# Altium PCB Holder_Base_V1.PcbDoc
Units mm, origin at the board's own origin, x right, y up, seen from the top; angles counter-clockwise.
Board outline 69.94 x 50 mm, 2 copper layers (Top Layer, Bottom Layer); 9 components, 19 nets, 21 pads, 0 vias.
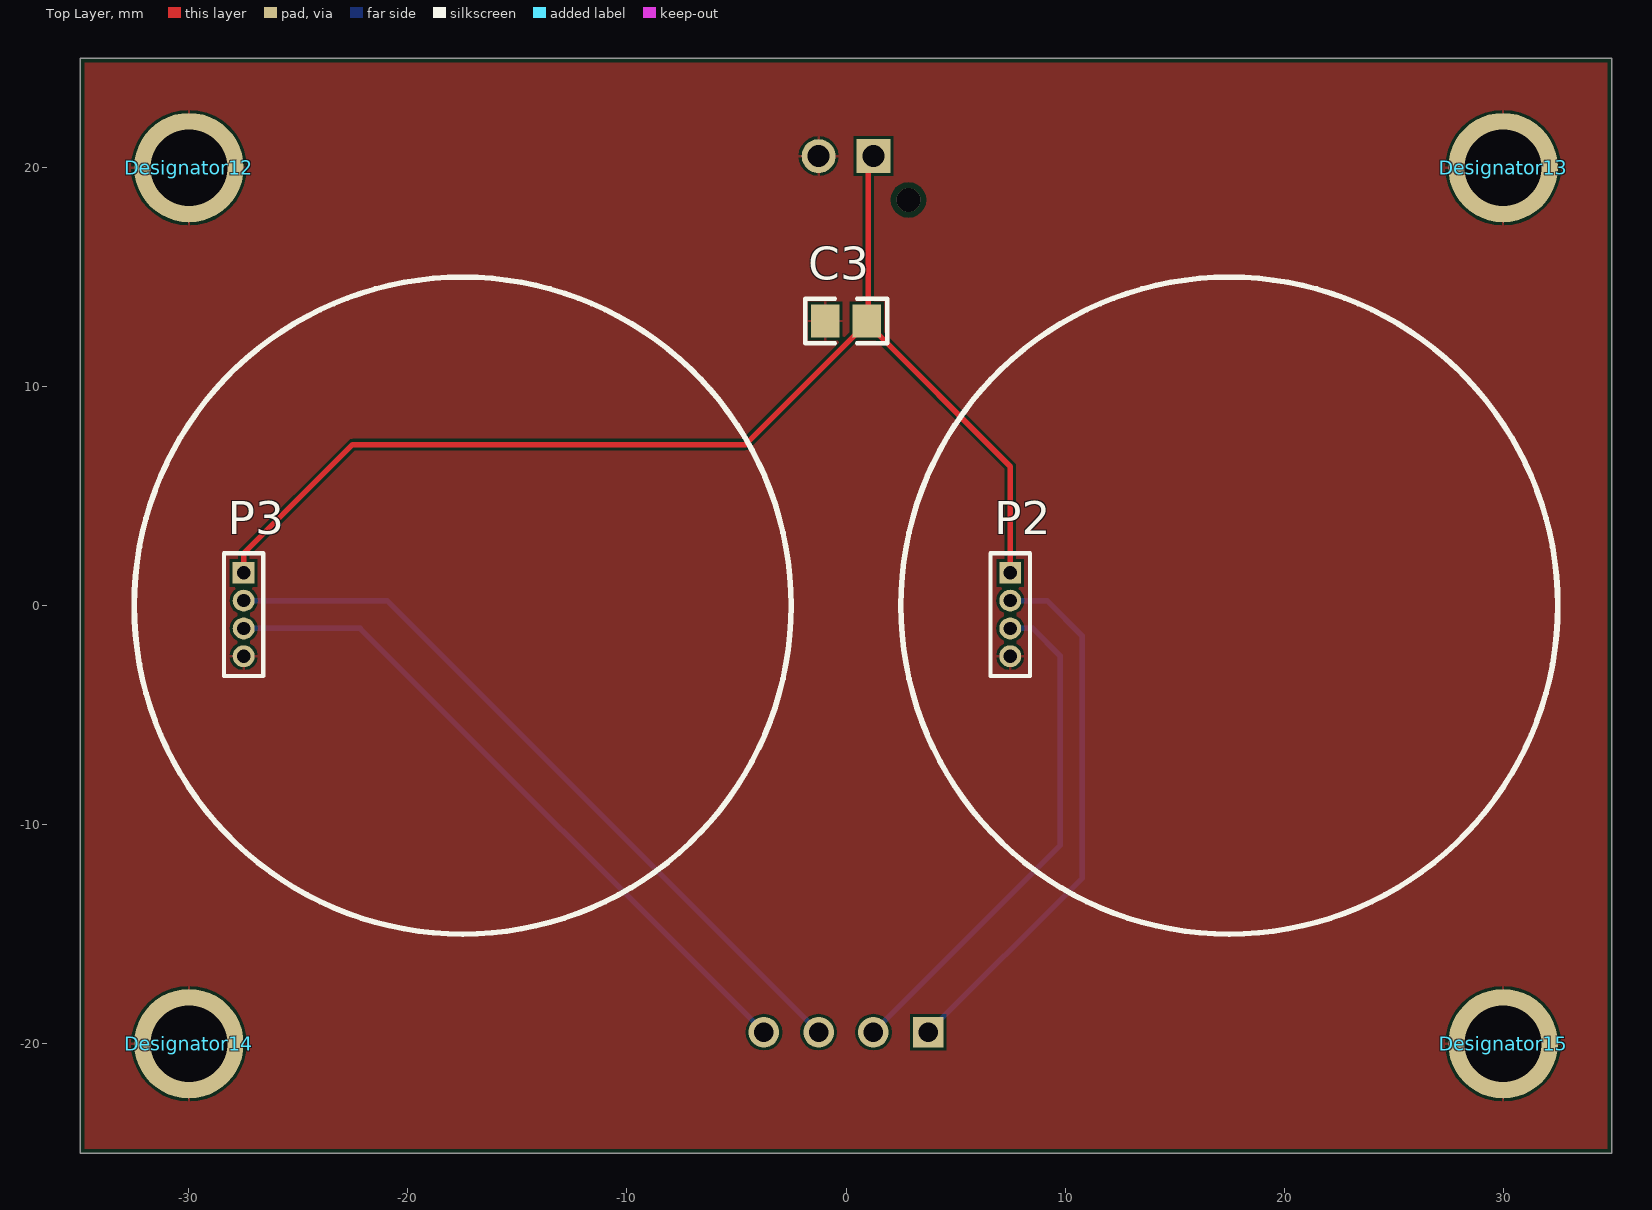
[diagram p0: Top Layer view]
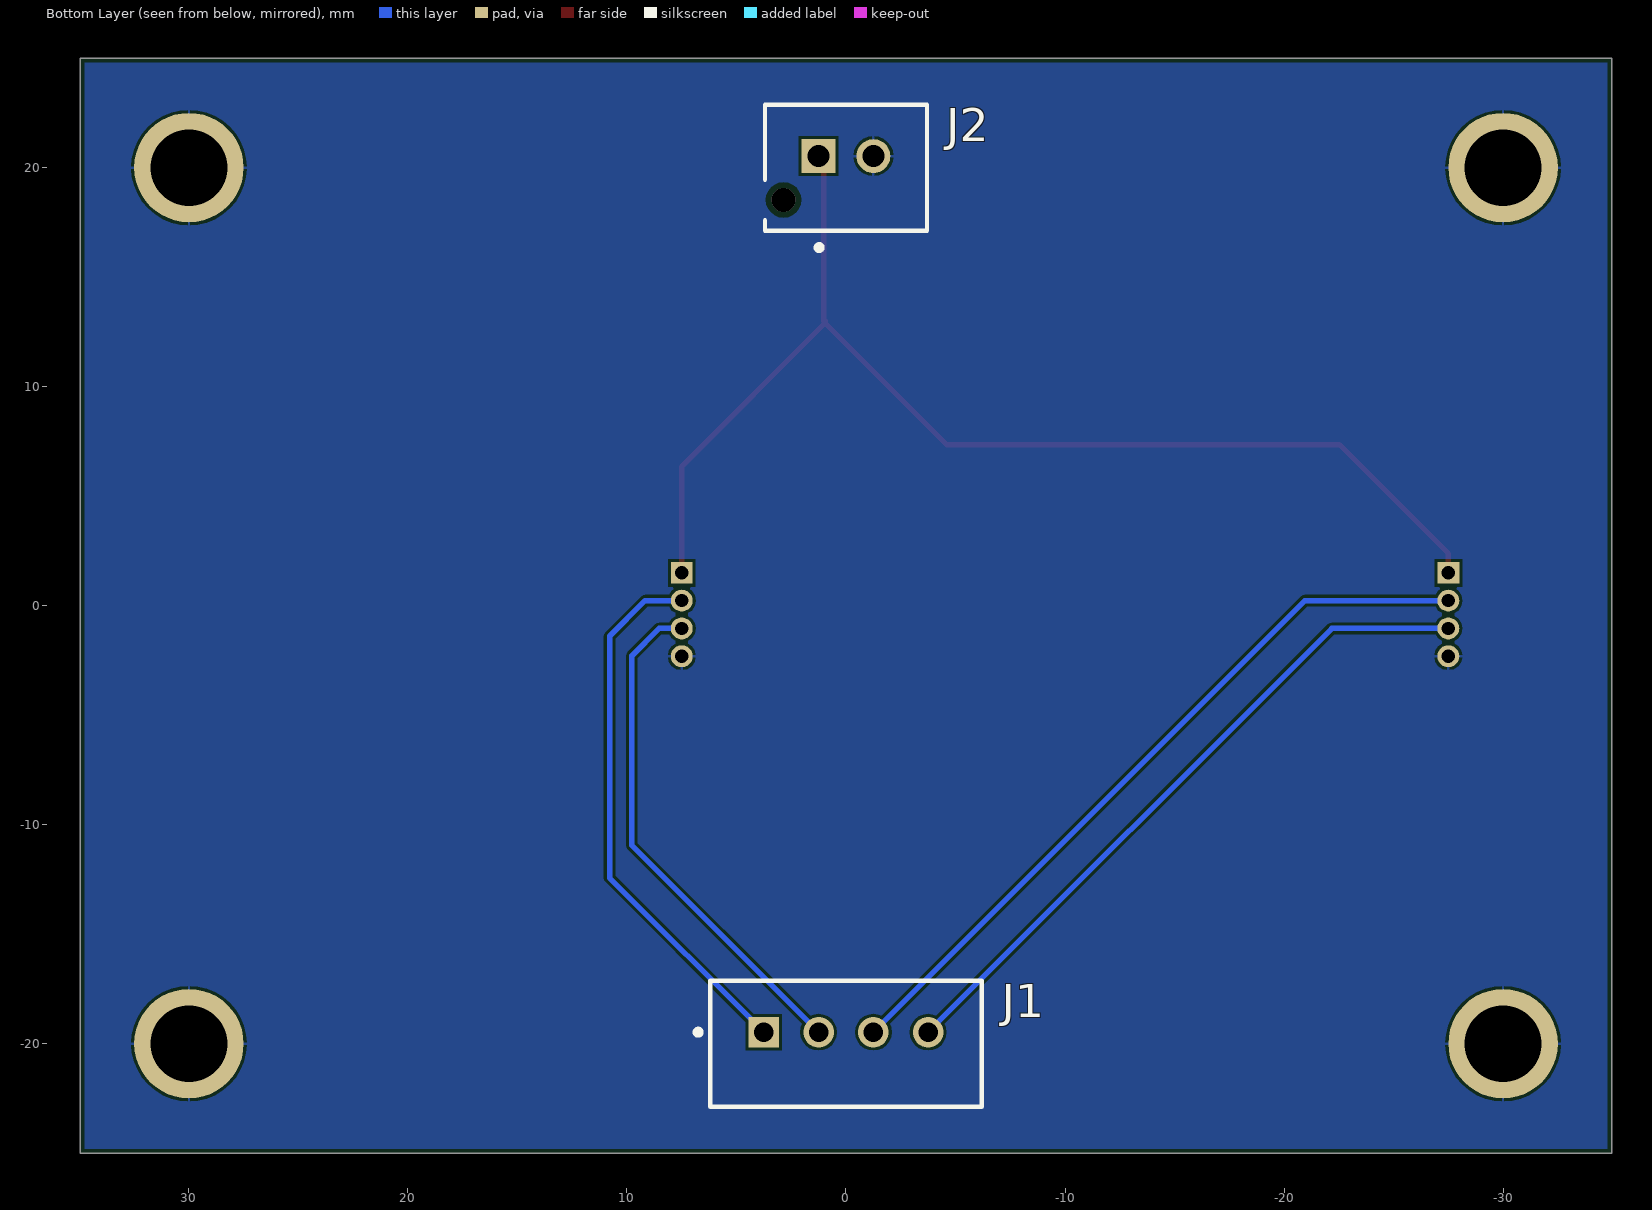
[diagram p1: Bottom Layer view, seen from below]

## Layer stack, top to bottom
Top Solder: solder mask 0.0102, Solder Resist, Dk 3.5
Top Layer: signal copper 0.0356
Dielectric 1: dielectric 0.32, FR-4, Dk 4.8
Bottom Layer: signal copper 0.0356
Bottom Solder: solder mask 0.0102, Solder Resist, Dk 3.5

## Board outline
-34.97,-25 -34.97,25 34.969,25 34.969,-25

## Design rules (kind name [scope] priority, off if disabled: settings)
BoardOutlineClearance [All] p1: gap=0.2 ignorepadtopadclearanceinfootprint=FALSE
Clearance [All] p1: gap=0.127 ignorepadtopadclearanceinfootprint=TRUE except(0.254: Arc-Hole Track-Hole SMDPad-Hole THPad-Hole Via-Hole Fill-Hole Poly-Hole Region-Hole Text-Hole)
ComponentClearance [All] p1: gap=0.127 collisioncheckmode=3 verticalgap=0.127 showdistances=TRUE
DiffPairsRouting [All] p1: maxlimit=0.254 minlimit=0.127 mostfreqgap=0.127 toplayer_minwidth=0.127 toplayer_maxwidth=25.4 toplayer_prefwidth=0.127 bottomlayer_minwidth=0.127 bottomlayer_maxwidth=25.4 bottomlayer_prefwidth=0.127 maxuncoupledlength=12.7
Height [All] p1: minheight=0 maxheight=1816.048 prefheight=12.7
HoleSize [All] p1: absolutevalues=TRUE maxlimit=6.3 minlimit=0.3 maxpercent=80.000 minpercent=20.000
HoleToHoleClearance [All] p1: gap=0.254 allowstackedmicrovias=FALSE
MinimumAnnularRing [All] p1: minimumring=0.152
MinimumSolderMaskSliver [All] p1: minsoldermaskwidth=0.152
PlaneClearance [All] p1: clearance=0.127
PlaneConnect PlaneConnectPowerPads [InPadClass('PowerPads')] p1: planeconnectstyle=Direct reliefexpansion=0.508 reliefentries=4 reliefconductorwidth=0.254 reliefairgap=0.254
PlaneConnect [All] p2: pad.planeconnectstyle=Relief pad.reliefexpansion=0.3 pad.reliefentries=4 pad.reliefconductorwidth=0.127 pad.reliefairgap=0.127 via.planeconnectstyle=Direct via.reliefexpansion=0.3 via.reliefentries=4 via.reliefconductorwidth=0.127 via.reliefairgap=0.127
PolygonConnect PolygonConnectPowerPads [All vs (InPadClass('PowerPads'))] p1: connectstyle=Direct reliefconductorwidth=0.254 reliefentries=4 polygonreliefangle="90 Angle" airgapwidth=0.254
PolygonConnect [All] p2: thpad.connectstyle=Relief thpad.reliefconductorwidth=0.127 thpad.reliefentries=4 thpad.polygonreliefangle="90 Angle" thpad.airgapwidth=0.127 smdpad.connectstyle=Relief smdpad.reliefconductorwidth=0.127 smdpad.reliefentries=4 smdpad.polygonreliefangle="90 Angle" smdpad.airgapwidth=0.127 via.connectstyle=Direct via.reliefconductorwidth=0.127 via.reliefentries=4 via.polygonreliefangle="90 Angle" via.airgapwidth=0.127
RoomDefinition Sheet2 [InComponentClass('Sheet2')] p1: confinementstyle=ConfineIn formatcopy=TRUE lockcomponents=FALSE outline -34.417,-24.257 34.29,-24.257 34.29,24.003 -34.417,24.003
RoutingVias [All] p1: holewidth=0.3 width=0.6 viastyle="Through Hole" minholewidth=0.3 minwidth=0.6 maxholewidth=0.6 maxwidth=6.6
SilkToSilkClearance [All] p1: silktosilkclearance=0.127
SilkToSolderMaskClearance [IsPad] p1: minsilkscreentomaskgap=0.127 clearancetoexposedcopper=TRUE
SolderMaskExpansion [All] p1: expansion=0.051 istentingtop=FALSE
UnRoutedNet [All] p1: checkbadconnections=TRUE
Width Width_10mil [All] p1: maxlimit=25.4 minlimit=0.254 preferedwidth=0.254 minimp=50.000000 maximp=50.000000 favimp=50.000000
Width Width_6mil [All] p2: maxlimit=25.4 minlimit=0.152 preferedwidth=0.152 minimp=50.000000 maximp=50.000000 favimp=50.000000
Width Power_20mil [All] p3: maxlimit=25.4 minlimit=0.508 preferedwidth=0.508 minimp=50.000000 maximp=50.000000 favimp=50.000000
Width Power_12mil [All] p4: maxlimit=25.4 minlimit=0.305 preferedwidth=0.305 minimp=50.000000 maximp=50.000000 favimp=50.000000
Width Width_5mil [All] p5: maxlimit=25.4 minlimit=0.127 preferedwidth=0.127 minimp=50.000000 maximp=50.000000 favimp=50.000000
Width [All] p6: maxlimit=0.254 minlimit=0.254 preferedwidth=0.254
19 further rules are at their usual default settings.

## Classes and differential pairs
component class Sheet2: C3 P2 P3

## Components (designator, comment, footprint, x,y, rotation, side; value= is the part's Value field where it differs from the comment)
C3 "10uF" 0805C 0,13 r0 top
Designator12 "Comment" SCREW_HOLE#1 -30.099,20.574 r0 top
Designator13 "Comment" SCREW_HOLE#2 29.972,19.939 r0 top
Designator14 "Comment" SCREW_HOLE#3 -29.464,-21.463 r0 top
Designator15 "Comment" SCREW_HOLE#4 30.988,-20.955 r0 top
J1 "B4B-XH-A(LF)(SN)" FP-B4B-XH-A_LF_SN-MFG 0,-20 r0 bottom
J2 "B2B-XH-AM(LF)(SN)" FP-B2B-XH-AM_LF_SN-MFG 0,20 r0 bottom
P2 "MHDR1X4" MHDR1X4 7.5,1.5 r270 top
P3 "MHDR1X4" MHDR1X4 -27.5,1.5 r270 top

## Footprints (in the part's own frame and the unit in brackets; to place one, negate y for a bottom-side part, rotate by r counter-clockwise, add the part's x,y. Pads: shape width x height; smd on the part's side, far side on the other; paste and mask are expansions set on the pad)
0805C [mm] "0805 Footprint"
  rect 1.3x1.5 smd: 1(-0.95,0) 2(0.95,0)
  silkscreen extent -1.87,-1.02 1.88,1.02, body extent -1,-0.62 1,0.63, height 0.78
FP-B2B-XH-AM_LF_SN-MFG [mm]
  rect 1.55x1.55 hole 1 paste-1000 mask+0: 1(1.25,-0.525)
  round 1.55 hole 1 paste-1000 mask+0: 2(-1.25,-0.525)
  round 1.1 hole 1.1 unplated paste-1000 mask+0: ""(2.85,1.475)
  silkscreen extent -3.7,-2.88 3.7,3.77, body extent -3.7,-2.88 3.7,2.88, height 7
FP-B4B-XH-A_LF_SN-MFG [mm]
  rect 1.4x1.4 hole 0.9 paste-1000 mask+0: 1(3.75,-0.525)
  round 1.4 hole 0.9 paste-1000 mask+0: 2(1.25,-0.525) 3(-1.25,-0.525) 4(-3.75,-0.525)
  silkscreen extent -6.2,-2.88 6.88,2.88, body extent -6.2,-2.88 6.2,2.88, height 7
MHDR1X4 [mm] "Connector; Header; 4 Position"
  rect 1x1 hole 0.6: 1(0,0)
  round 1 hole 0.6: 2(1.27,0) 3(2.54,0) 4(3.81,0)
  silkscreen extent -0.9,-0.9 4.71,0.9
SCREW_HOLE#1 [mm]
  round 5 hole 3.5: ""(0.099,-0.574)
SCREW_HOLE#2 [mm]
  round 5 hole 3.5: ""(0.028,0.061)
SCREW_HOLE#3 [mm]
  round 5 hole 3.5: ""(-0.536,1.463)
SCREW_HOLE#4 [mm]
  round 5 hole 3.5: ""(-0.988,0.955)

## Part data
C3: library part C, "Capacitor", Reviewed by="RM - 2018/08/05", Revision="July-2002: Re-released for DXP Platform."
J1: library part CMP-17439-000250-1, "CONN HEADER VERT 4POS 2.5MM", Color=Natural, Contact Resistance=20mR, Current Rating=3A, Flammability Rating="UL94 V-0", Housing Color=White, Insulation Resistance=1GR, Max Operating Temperature=85°C, Max Voltage Rating (AC)=250V, Min Operating Temperature=-25°C, Package Quantity=500, Connector Type=Header, Contact Finish - Mating=TIN, Contact Material=Brass, Contact Plating=Tin, Contact Shape=Square, Contact Type="Male Pin", Depth=5.75mm, Fastening Type=Detent, Gender=Male, Housing Material=Polyamide, Insulation Color=Natural, Insulation Material=Nylon, Lead Free="Lead Free", Lead Pitch=2.5mm, Length=12.4mm, Mated Stacking Heights=9.8mm, Material=Polyamide, Max Current Rating=3A, Max Voltage Rating (DC)=250V, Mount="Through Hole", Number of Contacts=4, Number of Positions=4, Number of Rows=1, Orientation=Straight, Packaging=Bulk, Pitch=2.5mm, REACH SVHC="No SVHC", Series=XH, Termination=Solder, Voltage Rating=250V, Voltage Rating (AC)=250V, Wire/Cable Gauge=22AWG
J2: library part CMP-17439-000037-1, "CONN HEADER VERT 2POS 2.5MM", Color=Green, Contact Resistance=20mR, Housing Color=White, Max Current Rating=3A, Max Operating Temperature=85°C, Max Voltage Rating (AC)=250V, Min Operating Temperature=-25°C, Connector Type="Male Pin", Contact Material=Brass, Contact Plating=Tin, Contact Type="Male Pin", Depth=5.75mm, Fastening Type=Detent, Housing Material=Polyamide, Lead Free="Lead Free", Length=7.4mm, Mount="Through Hole", Number of Positions=2, Number of Rows=1, Orientation=Straight, Packaging=Bulk, Pitch=2.5mm, Series=XH, Termination=Solder
P2 P3: "Header, 4-Pin", LatestRevisionDate=17-Jul-2002, LatestRevisionNote="Re-released for DXP Platform.", Publisher="Altium Limited"

## Nets (pads, with @x,y where several pads share a name; then routed paths per layer and width w, separated by ;. In a path a pad name is that pad's centre, name@x,y a point inside that pad or via, vN(x,y) a via of type N, cw(c..) or ccw(c..) an arc to the next point about the centre after c; other vN are vias at no path point)
DIN_SK6812: 
DIN_SK6812_1: J1.1 P2.2 | length 25
  Bottom Layer w0.254: J1.1 10.795,-12.43 10.795,-1.397 9.168,0.23 P2.2
DIN_SK6812_2: J1.3 P3.2 | length 34.4
  Bottom Layer w0.254: P3.2 -20.955,0.23 J1.3
DIN_WS2812: 
DIN_WS2812_1: J1.2 P2.3 | length 23.5
  Bottom Layer w0.254: J1.2 9.779,-10.946 9.779,-2.286 8.533,-1.04 P2.3
DIN_WS2812_2: J1.4 P3.3 | length 31.4
  Bottom Layer w0.254: P3.3 -22.185,-1.04 J1.4
DOUT1: 
DOUT2: 
DOUT3: 
DOUT4: 
DOUT5: 
DOUT6: 
DOUT7: 
DOUT8: 
DOUT9: 
GND: C3.1 Designator12. Designator13. Designator14. Designator15. J2.2 P2.4 P3.4
NetP1_1: 
VCC: C3.2 J2.1 P2.1 P3.1 | length 55.5
  Top Layer w0.254: P3.1 -27.5,2.381 -22.527,7.354 -4.596,7.354 C3.2@0.95,12.9 ; C3.2 C3.2@0.95,12.9 ; C3.2@1.016,13 1.016,20.291 J2.1 ; P2.1 7.5,6.35 C3.2@0.95,12.9
VDD: 
pads on no net: J2.

## Polygon pours and split planes (outlines as drawn)
GND on Top Layer "GND_TOP" (solid, pour order 0): -34.97,-25 -34.97,25 34.969,25 34.969,-25
GND on Bottom Layer "GND_BOT" (solid, pour order 1): -34.97,-25 -34.97,25 34.969,25 34.969,-25

## Silkscreen, mask and mechanical layers (free items; w line width, h text height)
Top Overlay:
  circle w0.254: c17.5,0 r15
  circle w0.254: c-17.5,0 r15
Mechanical 1:
  lines w0.254: -15.031,25 -34.97,25 ; -14.993,-25 -34.969,-25 ; 15.031,25 35.007,25 ; 15.068,-25.038 35.007,-25.038 ; -34.97,-25 34.969,-25 34.969,25 -34.97,25 ; -34.97,-25 -34.97,25